# EAGLE board Bottom PCB Board Design (EAGLE 9.7.0), part 1 of 2
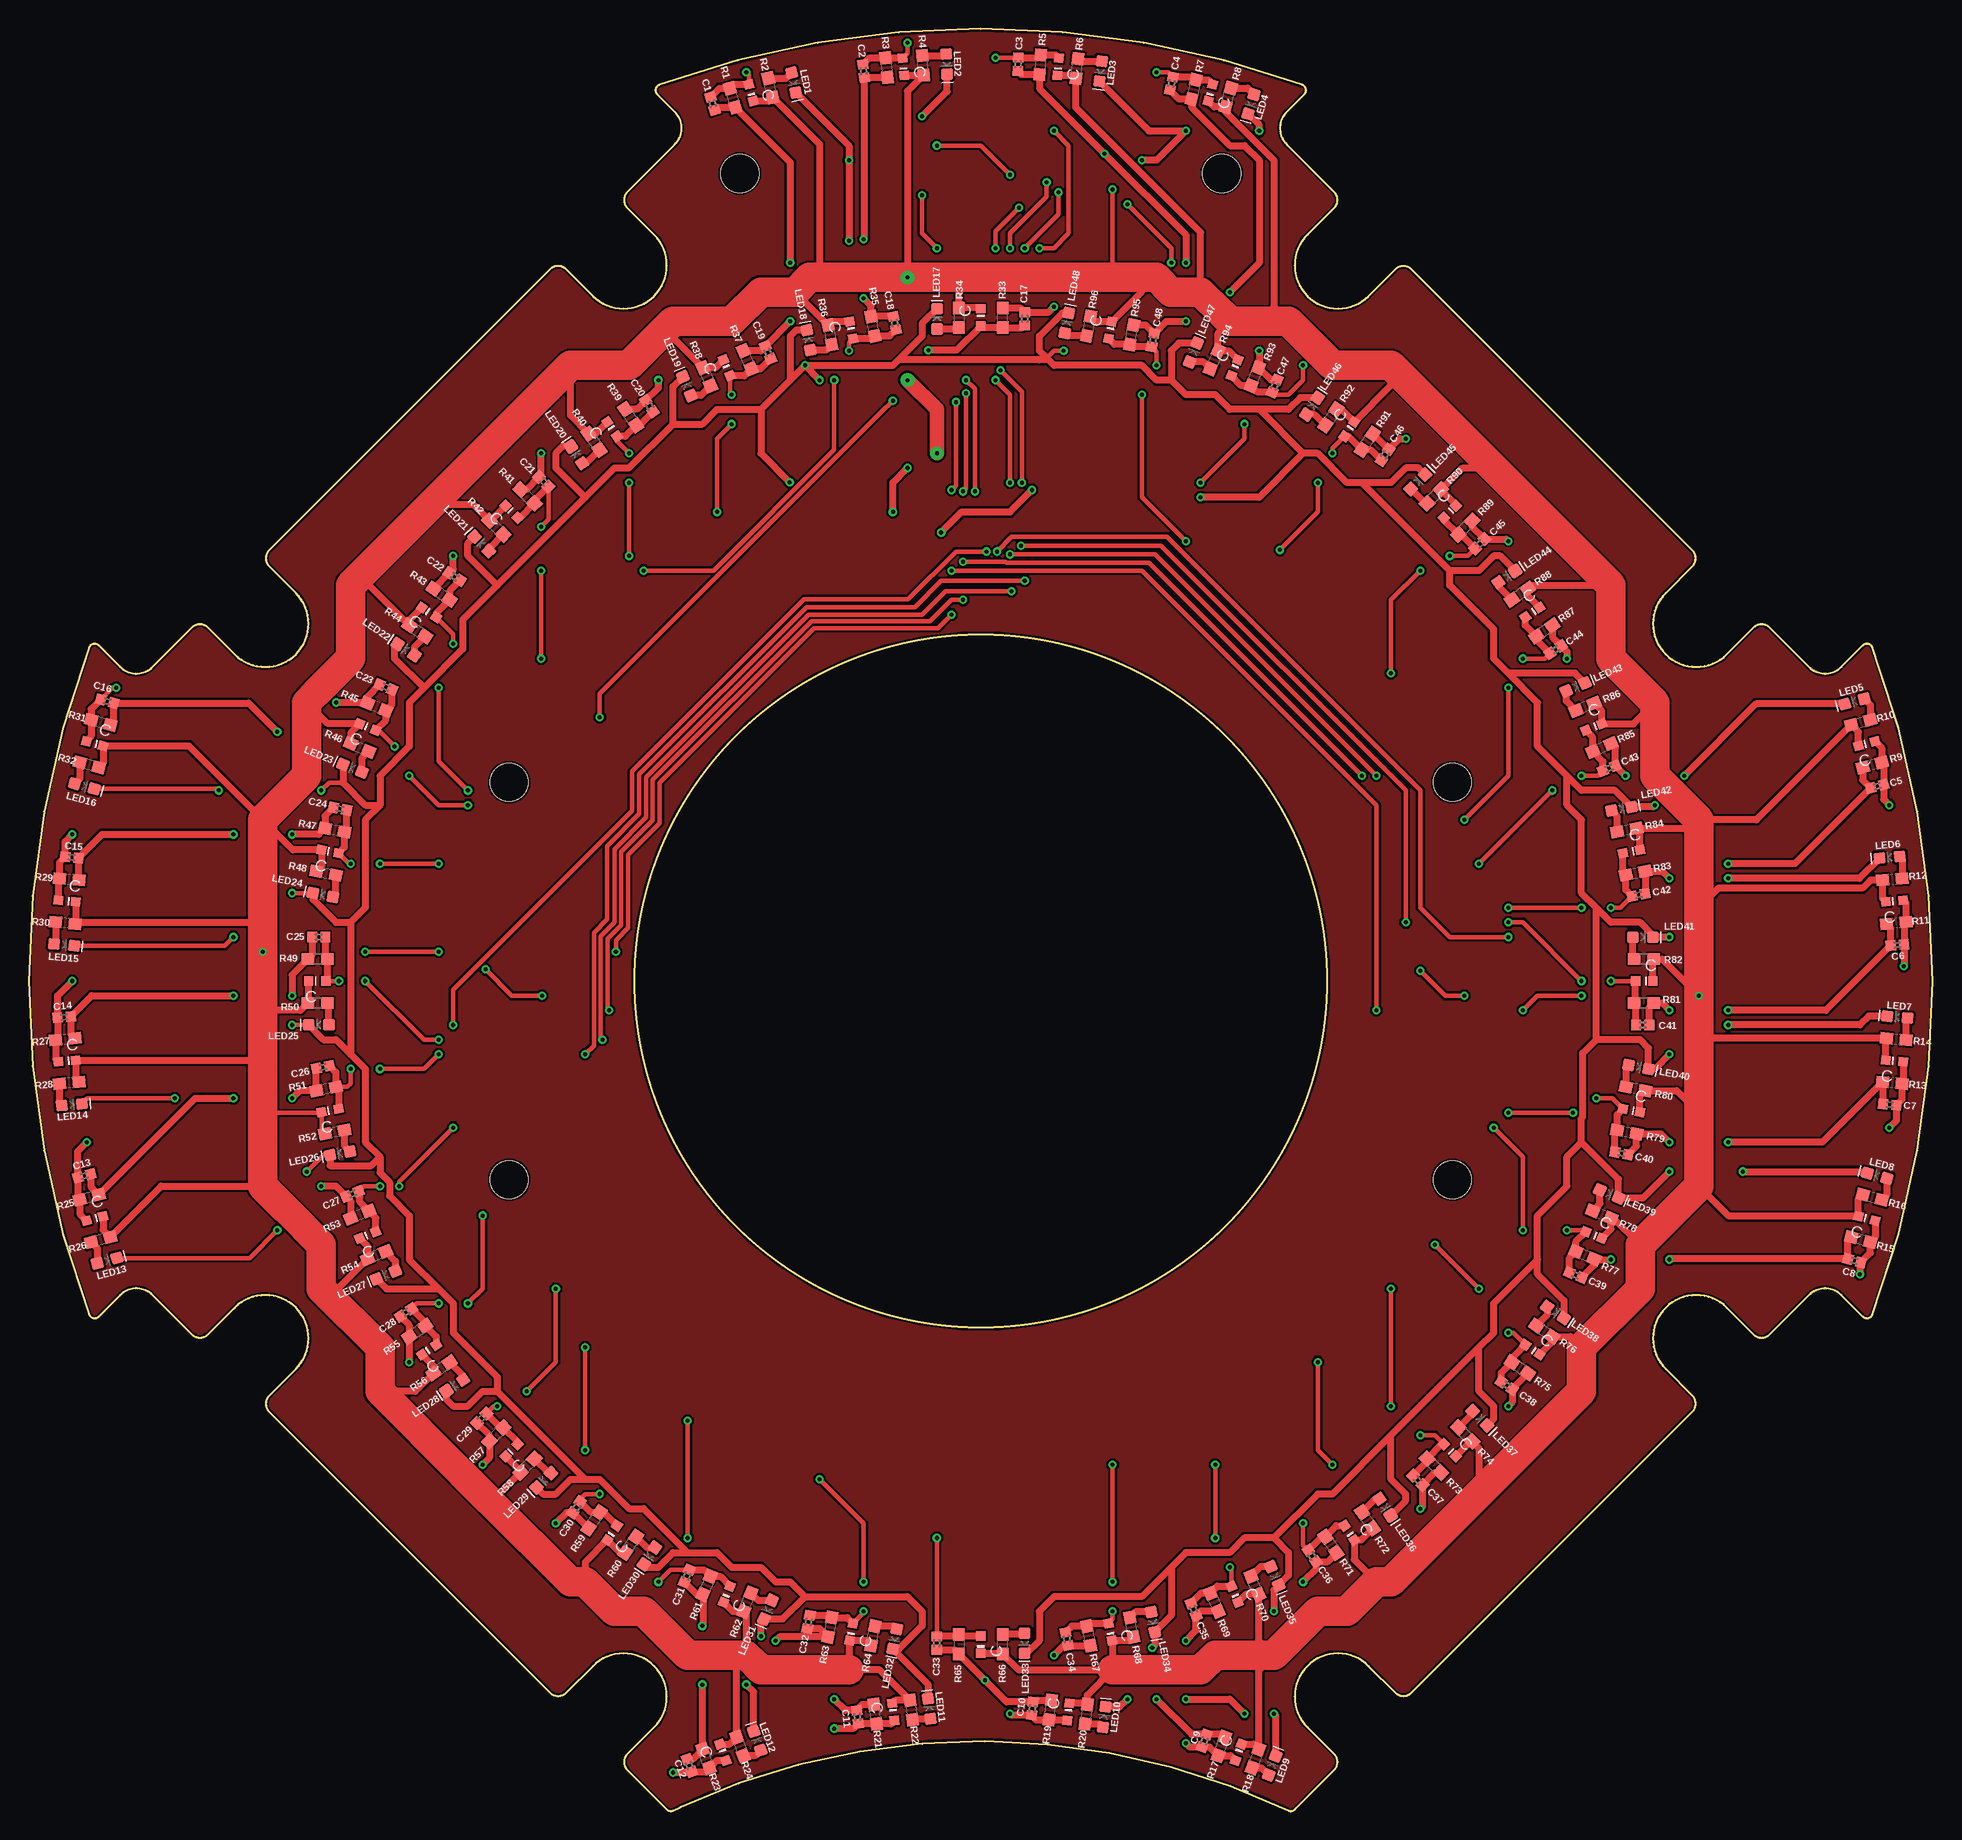
[diagram p0: board, top side]
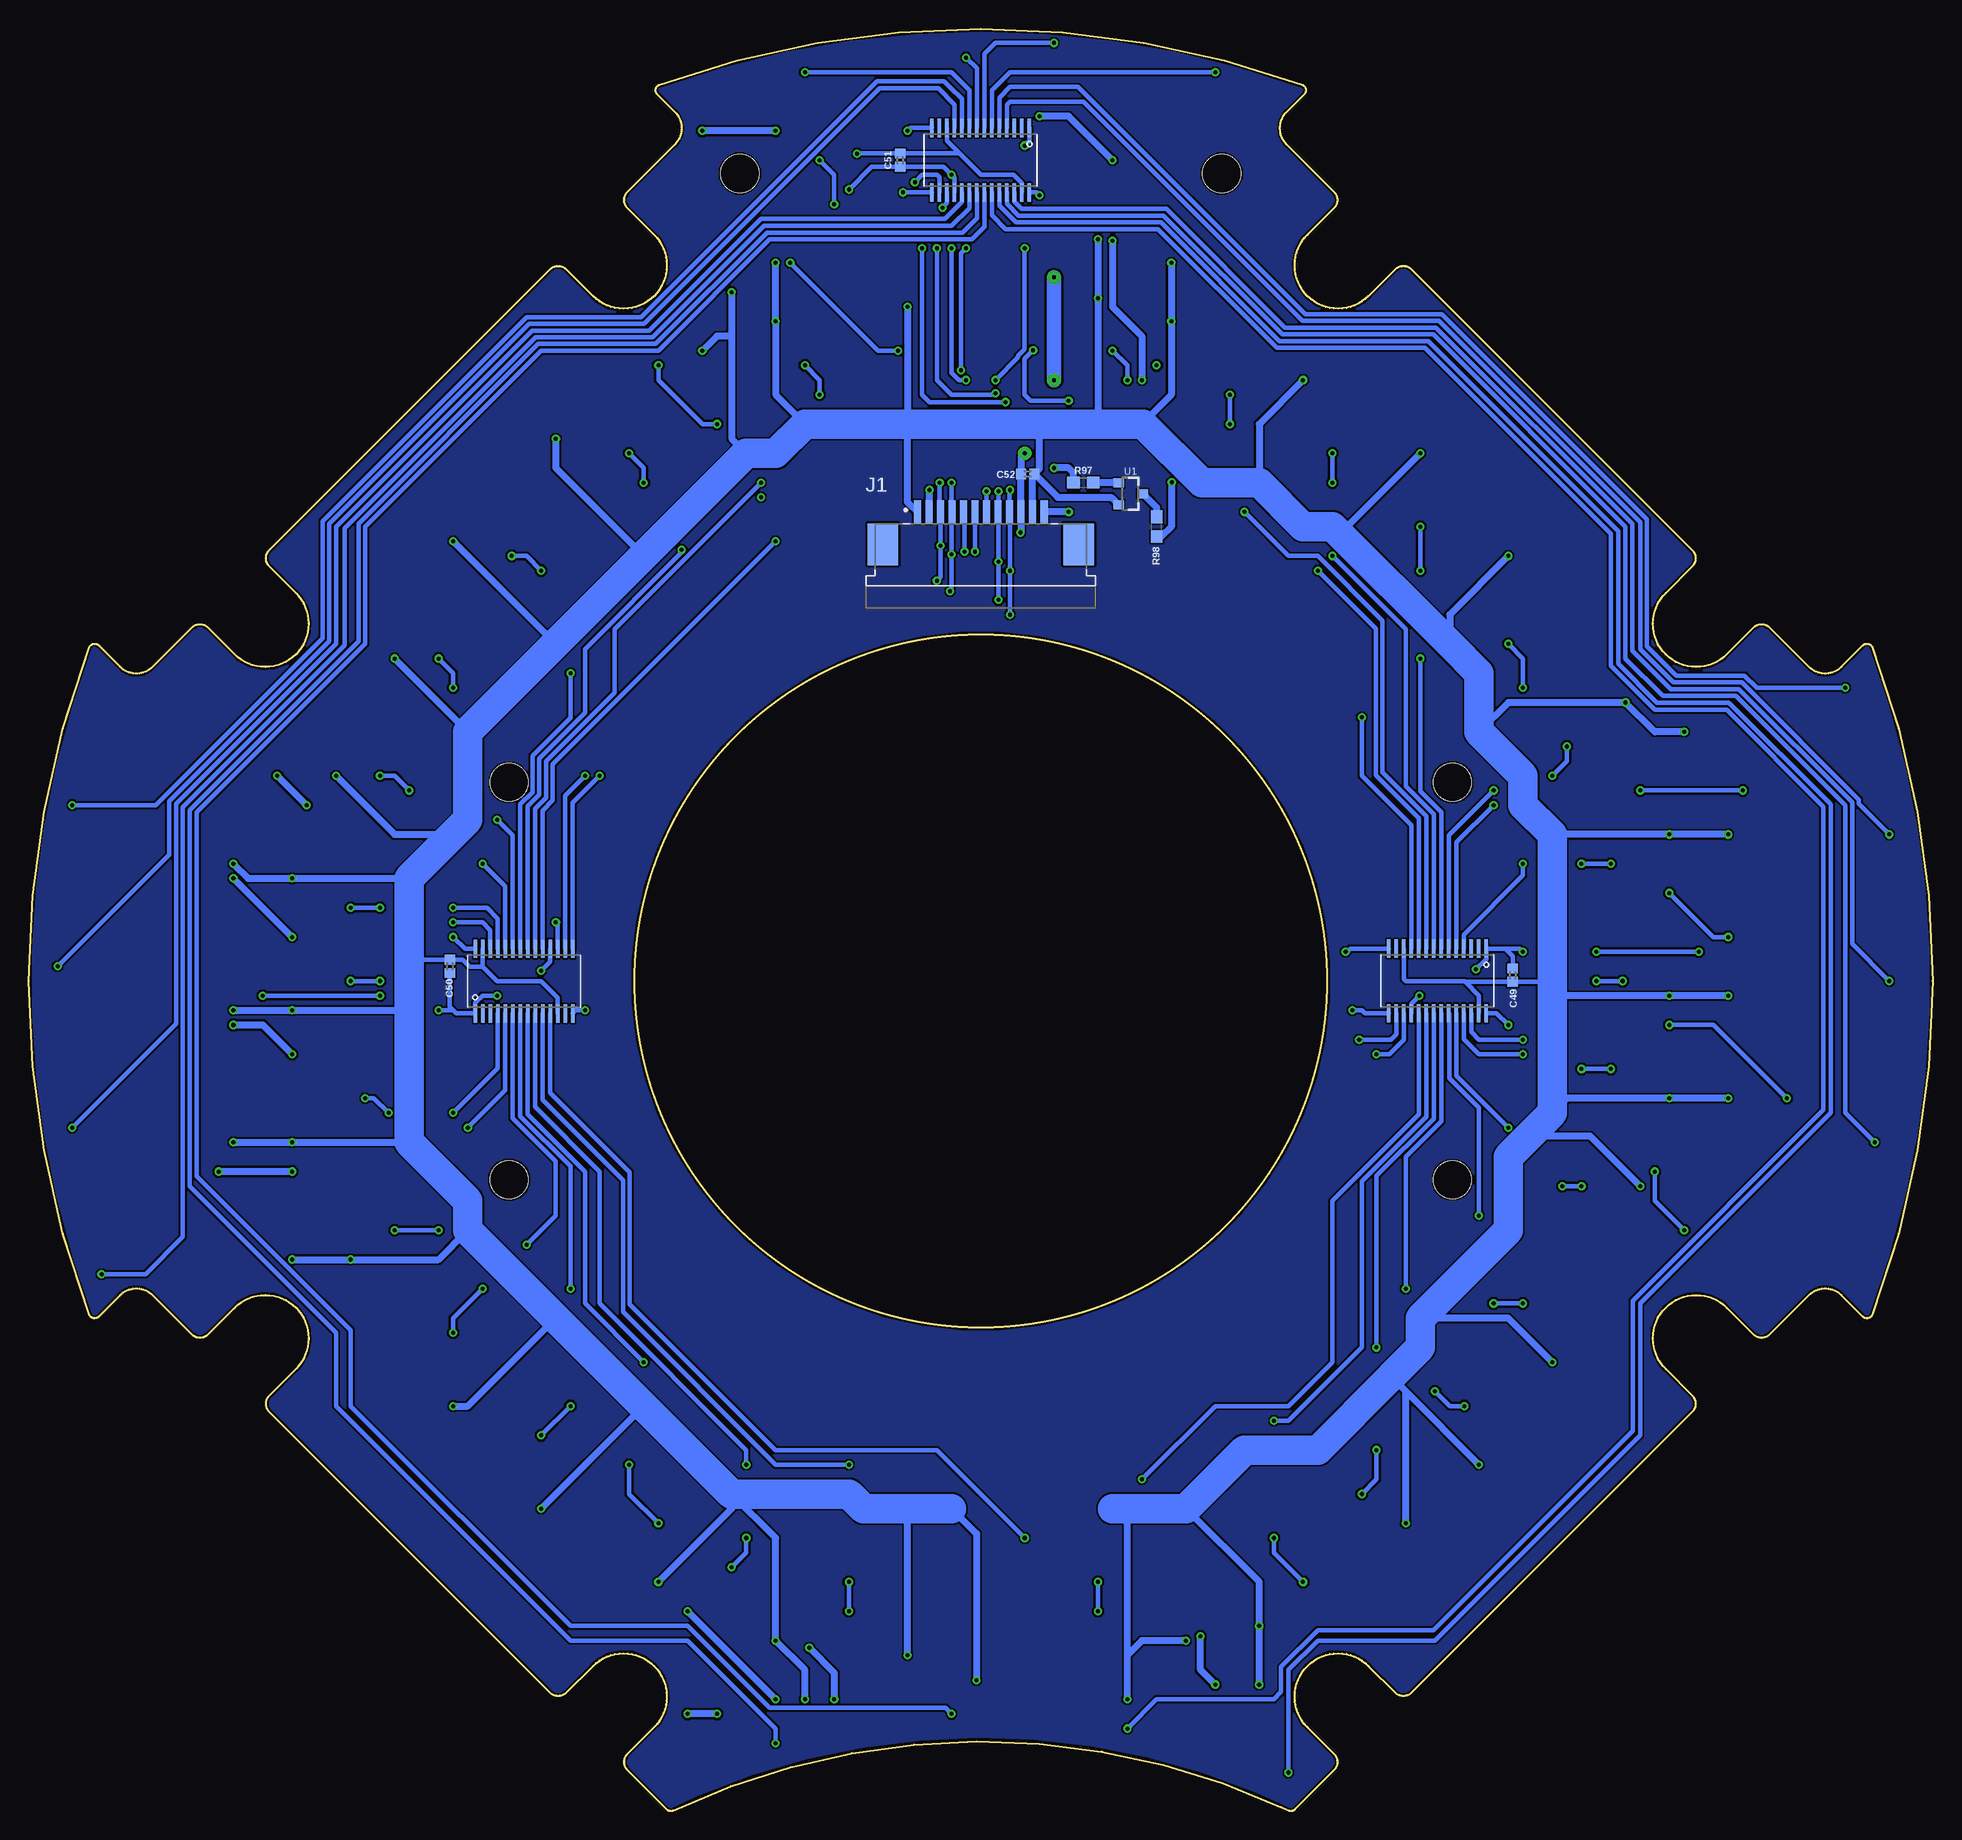
[diagram p1: board, bottom side, seen from below]

Size 165 x 154.42 mm. Coordinates in mm from the lower left corner, seen from the top.
Outline: 23.15,38.31 20.84,36 arc90 20.84,34.59 45.16,10.26 arc90 46.58,10.26 48.89,12.57 arc-180 54.19,7.27 51.88,4.96 arc90 51.88,3.54 55.28,0.15 arc70 55.85,0.05 56.48,0.34 arc-50 109.16,0.05 109.2,0.03 arc65 109.72,0.15 113.12,3.54 arc90 113.12,4.96 110.81,7.27 arc-180 116.11,12.57 118.42,10.26 arc90 119.84,10.26 144.16,34.59 arc90 144.16,36 141.85,38.31 arc-180 147.16,43.61 149.46,41.3 arc90 150.88,41.3 154.27,44.7 arc-90 157.1,44.7 158.95,42.85 arc114 159.77,43.03 arc41 159.77,100.82 159.76,100.86 arc110 158.95,101 157.1,99.15 arc-90 154.27,99.15 150.88,102.54 arc90 149.46,102.54 147.16,100.23 arc-180 141.85,105.54 144.16,107.84 arc90 144.16,109.26 119.84,133.58 arc90 118.42,133.58 116.11,131.28 arc-180 110.81,136.58 113.12,138.89 arc90 113.12,140.3 109.02,144.4 arc-90 109.02,147.23 110.54,148.75 arc115 110.36,149.58 arc39 54.64,149.58 54.6,149.56 arc110 54.46,148.75 55.98,147.23 arc-90 55.98,144.4 51.88,140.3 arc90 51.88,138.89 54.19,136.58 arc-180 48.89,131.28 46.58,133.58 arc90 45.16,133.58 20.84,109.26 arc90 20.84,107.84 23.15,105.54 arc-180 17.84,100.23 15.54,102.54 arc90 14.12,102.54 10.73,99.15 arc-90 7.9,99.15 6.05,101 arc114 5.23,100.82 arc41 5.23,43.03 5.24,42.99 arc110 6.05,42.85 7.9,44.7 arc-90 10.73,44.7 14.12,41.3 arc90 15.54,41.3 17.84,43.61 arc-180 23.15,38.31
Outline: circle at 82.5,71.92 radius 30
Copper layers (1*16): Top / Bottom
Stack-up Default Layer Stack: Top User Defined 0.035mm / Dielectric-1 User Defined 1.5mm / Bottom User Defined 0.035mm
Design rules: minimum copper width 7mil, minimum drill size 0.3mm, copper clearance wire_polygon to wire_polygon 7mil, copper clearance wire_polygon to pad_smd 7mil, copper clearance wire_polygon to via 7mil, copper clearance pad_smd to pad_smd 7mil, copper clearance pad_smd to via 7mil, copper clearance via to via 7mil, copper clearance smd to pad (same net) 7mil, copper clearance smd to via (same net) 7mil, copper clearance smd to smd (same net) 7mil, dimension clearance 7mil, via restrict clearance 0mil, restrict clearance 0mil, drill distance 7mil, keepout clearance 0mil
Holes 3.3 mm at 123.38,89.13 61.62,141.89 41.63,54.71 41.63,89.13 103.39,141.89 123.38,54.71

## Footprints (pad centres in the part's own frame; a part is rotated, then mirrored left to right if it is on the bottom)
0402 = smd 0.85 x 0.9: 1 -0.58,0; 2 0.58,0
TE_1-84953-2 = smd 0.61 x 2: 1 -5.5,0; 2 -4.5,0; 3 -3.5,0; 4 -2.5,0; 5 -1.5,0; 6 -0.5,0; 7 0.5,0; 8 1.5,0; 9 2.5,0; 10 3.5,0; 11 4.5,0; 12 5.5,0 | smd 2.68 x 3.6: S1 -8.49,-2.8; S2 8.49,-2.8
LED-0603 = smd 1 x 1: A -0.877,0; C 0.877,0
28-TSSOP = smd 0.3 x 1.6: 1 0,-5.6; 2 0.65,-5.6; 3 1.3,-5.6; 4 1.95,-5.6; 5 2.6,-5.6; 6 3.25,-5.6; 7 3.9,-5.6; 8 4.55,-5.6; 9 5.2,-5.6; 10 5.85,-5.6; 11 6.5,-5.6; 12 7.15,-5.6; 13 7.8,-5.6; 14 8.45,-5.6; 15 8.45,0; 16 7.8,0; 17 7.15,0; 18 6.5,0; 19 5.85,0; 20 5.2,0; 21 4.55,0; 22 3.9,0; 23 3.25,0; 24 2.6,0; 25 1.95,0; 26 1.3,0; 27 0.65,0; 28 0,0
SMD = smd 0.8 x 0.8: C -0.75,0; E 0.75,0
0603 = smd 1.1 x 1: 1 -0.85,0; 2 0.85,0
SOT23-3 = smd 0.8 x 0.9: 1 -0.95,-1; 2 0.95,-1; 3 0,1.1

## Placement (x,y rotation side)
C1  0.1uF  [0402]  59.26,147.95 107 top
C2  0.1uF  [0402]  72.35,150.77 97 top
C3  0.1uF  [0402]  85.74,151.36 88 top
C4  0.1uF  [0402]  99.03,149.69 78 top
C5  0.1uF  [0402]  160.19,88.8 15 top
C6  0.1uF  [0402]  161.94,75.05 5 top
C7  0.1uF  [0402]  161.27,61.21 355 top
C8  0.1uF  [0402]  158.22,47.69 345 top
C9  0.1uF  [0402]  101.88,6.09 250 top
C10  0.1uF  [0402]  86.97,8.88 263 top
C11  0.1uF  [0402]  71.82,8.15 277 top
C12  0.1uF  [0402]  57.24,3.95 290 top
C13  0.1uF  [0402]  4.81,55.05 195 top
C14  0.1uF  [0402]  3.06,68.79 185 top
C15  0.1uF  [0402]  3.73,82.64 175 top
C16  0.1uF  [0402]  6.78,96.15 165 top
C17  0.1uF  [0402]  86.31,129.3 270 top
C18  0.1uF  [0402]  75.04,128.94 281 top
C19  0.1uF  [0402]  64.06,126.39 293 top
C20  0.1uF  [0402]  53.79,121.74 304 top
C21  0.1uF  [0402]  44.62,115.18 315 top
C22  0.1uF  [0402]  36.91,106.96 326 top
C23  0.1uF  [0402]  30.95,97.39 337 top
C24  0.1uF  [0402]  26.97,86.85 349 top
C25  0.1uF  [0402]  25.13,75.73 0 top
C26  0.1uF  [0402]  25.49,64.46 11 top
C27  0.1uF  [0402]  28.04,53.48 23 top
C28  0.1uF  [0402]  32.68,43.21 34 top
C29  0.1uF  [0402]  39.24,34.04 45 top
C30  0.1uF  [0402]  47.46,26.33 56 top
C31  0.1uF  [0402]  57.03,20.37 68 top
C32  0.1uF  [0402]  67.57,16.39 79 top
C33  0.1uF  [0402]  78.69,14.55 90 top
C34  0.1uF  [0402]  89.96,14.91 101 top
C35  0.1uF  [0402]  100.94,17.46 113 top
C36  0.1uF  [0402]  111.21,22.1 124 top
C37  0.1uF  [0402]  120.38,28.66 135 top
C38  0.1uF  [0402]  128.09,36.88 146 top
C39  0.1uF  [0402]  134.05,46.45 158 top
C40  0.1uF  [0402]  138.03,57 169 top
C41  0.1uF  [0402]  139.87,68.12 180 top
C42  0.1uF  [0402]  139.51,79.38 191 top
C43  0.1uF  [0402]  136.96,90.36 202 top
C44  0.1uF  [0402]  132.32,100.63 214 top
C45  0.1uF  [0402]  125.76,109.8 225 top
C46  0.1uF  [0402]  117.54,117.51 236 top
C47  0.1uF  [0402]  107.97,123.47 247 top
C48  0.1uF  [0402]  97.43,127.45 259 top
C49  0.1uF  [0402]  36.4,72.43 270 bottom
C50  0.1uF  [0402]  128.52,73.19 90 bottom
C51  0.1uF  [0402]  89.49,143.04 90 bottom
C52  0.1uF  [0402]  78.44,115.86 180 bottom
J1  1-84953-2  [TE_1-84953-2]  82.5,112.56 0 bottom
LED1  WHITE  [LED-0603]  66.29,149.76 282 top
LED2  WHITE  [LED-0603]  79.55,151.37 272 top
LED3  WHITE  [LED-0603]  92.88,150.75 263 top
LED4  WHITE  [LED-0603]  105.93,147.9 253 top
LED5  WHITE  [LED-0603]  158.22,96.15 195 top
LED6  WHITE  [LED-0603]  161.27,82.64 185 top
LED7  WHITE  [LED-0603]  161.94,68.79 175 top
LED8  WHITE  [LED-0603]  160.19,55.05 165 top
LED9  WHITE  [LED-0603]  107.76,3.95 70 top
LED10  WHITE  [LED-0603]  93.18,8.15 83 top
LED11  WHITE  [LED-0603]  78.03,8.88 97 top
LED12  WHITE  [LED-0603]  63.12,6.09 110 top
LED13  WHITE  [LED-0603]  6.78,47.69 15 top
LED14  WHITE  [LED-0603]  3.73,61.21 5 top
LED15  WHITE  [LED-0603]  3.06,75.05 355 top
LED16  WHITE  [LED-0603]  4.81,88.8 345 top
LED17  WHITE  [LED-0603]  78.69,129.3 90 top
LED18  WHITE  [LED-0603]  67.57,127.45 101 top
LED19  WHITE  [LED-0603]  57.03,123.47 113 top
LED20  WHITE  [LED-0603]  47.46,117.51 124 top
LED21  WHITE  [LED-0603]  39.24,109.8 135 top
LED22  WHITE  [LED-0603]  32.68,100.63 146 top
LED23  WHITE  [LED-0603]  28.04,90.36 158 top
LED24  WHITE  [LED-0603]  25.49,79.38 169 top
LED25  WHITE  [LED-0603]  25.13,68.12 180 top
LED26  WHITE  [LED-0603]  26.97,57 191 top
LED27  WHITE  [LED-0603]  30.95,46.45 202 top
LED28  WHITE  [LED-0603]  36.91,36.88 214 top
LED29  WHITE  [LED-0603]  44.62,28.66 225 top
LED30  WHITE  [LED-0603]  53.79,22.1 236 top
LED31  WHITE  [LED-0603]  64.06,17.46 247 top
LED32  WHITE  [LED-0603]  75.04,14.91 259 top
LED33  WHITE  [LED-0603]  86.31,14.55 270 top
LED34  WHITE  [LED-0603]  97.43,16.39 281 top
LED35  WHITE  [LED-0603]  107.97,20.37 293 top
LED36  WHITE  [LED-0603]  117.54,26.33 304 top
LED37  WHITE  [LED-0603]  125.76,34.04 315 top
LED38  WHITE  [LED-0603]  132.32,43.21 326 top
LED39  WHITE  [LED-0603]  136.96,53.48 337 top
LED40  WHITE  [LED-0603]  139.51,64.46 349 top
LED41  WHITE  [LED-0603]  139.87,75.73 0 top
LED42  WHITE  [LED-0603]  138.03,86.85 11 top
LED43  WHITE  [LED-0603]  134.05,97.39 23 top
LED44  WHITE  [LED-0603]  128.09,106.96 34 top
LED45  WHITE  [LED-0603]  120.38,115.18 45 top
LED46  WHITE  [LED-0603]  111.21,121.74 56 top
LED47  WHITE  [LED-0603]  100.94,126.39 68 top
LED48  WHITE  [LED-0603]  89.96,128.94 79 top
MUX1  MUX506  [28-TSSOP]  38.69,69.13 180 bottom
MUX2  MUX506  [28-TSSOP]  126.32,74.72 0 bottom
MUX3  MUX506  [28-TSSOP]  78.28,140.25 180 bottom
Q1  ALS  [SMD]  62.59,148.89 105 top
Q2  ALS  [SMD]  75.8,151.14 95 top
Q3  ALS  [SMD]  89.2,151.14 85 top
Q4  ALS  [SMD]  102.41,148.89 75 top
Q5  ALS  [SMD]  159.29,92.5 15 top
Q6  ALS  [SMD]  161.7,78.85 5 top
Q7  ALS  [SMD]  161.7,64.99 355 top
Q8  ALS  [SMD]  159.29,51.35 345 top
Q9  ALS  [SMD]  104.84,5.09 250 top
Q10  ALS  [SMD]  90.08,8.59 263 top
Q11  ALS  [SMD]  74.92,8.59 277 top
Q12  ALS  [SMD]  60.16,5.09 290 top
Q13  ALS  [SMD]  5.71,51.35 195 top
Q14  ALS  [SMD]  3.3,64.99 185 top
Q15  ALS  [SMD]  3.3,78.85 175 top
Q16  ALS  [SMD]  5.71,92.5 165 top
Q17  ALS  [SMD]  82.5,129.42 270 top
Q18  ALS  [SMD]  71.28,128.32 281 top
Q19  ALS  [SMD]  60.5,125.05 293 top
Q20  ALS  [SMD]  50.55,119.73 304 top
Q21  ALS  [SMD]  41.84,112.58 315 top
Q22  ALS  [SMD]  34.69,103.87 326 top
Q23  ALS  [SMD]  29.38,93.93 337 top
Q24  ALS  [SMD]  26.1,83.14 349 top
Q25  ALS  [SMD]  25,71.92 0 top
Q26  ALS  [SMD]  26.1,60.7 11 top
Q27  ALS  [SMD]  29.38,49.92 23 top
Q28  ALS  [SMD]  34.69,39.98 34 top
Q29  ALS  [SMD]  41.84,31.26 45 top
Q30  ALS  [SMD]  50.55,24.11 56 top
Q31  ALS  [SMD]  60.5,18.8 68 top
Q32  ALS  [SMD]  71.28,15.53 79 top
Q33  ALS  [SMD]  82.5,14.42 90 top
Q34  ALS  [SMD]  93.72,15.53 101 top
Q35  ALS  [SMD]  104.5,18.8 113 top
Q36  ALS  [SMD]  114.45,24.11 124 top
Q37  ALS  [SMD]  123.16,31.26 135 top
Q38  ALS  [SMD]  130.31,39.98 146 top
Q39  ALS  [SMD]  135.62,49.92 158 top
Q40  ALS  [SMD]  138.9,60.7 169 top
Q41  ALS  [SMD]  140,71.92 180 top
Q42  ALS  [SMD]  138.9,83.14 191 top
Q43  ALS  [SMD]  135.62,93.93 202 top
Q44  ALS  [SMD]  130.31,103.87 214 top
Q45  ALS  [SMD]  123.16,112.58 225 top
Q46  ALS  [SMD]  114.45,119.73 236 top
Q47  ALS  [SMD]  104.5,125.05 247 top
Q48  ALS  [SMD]  93.72,128.32 259 top
R1  33k  [0603]  60.99,148.44 286 top
R2  100  [0603]  64.28,149.31 103 top
R3  33k  [0603]  74.33,151.07 276 top
R4  100  [0603]  77.49,151.26 94 top
R5  33k  [0603]  87.65,151.31 266 top
R6  100  [0603]  90.83,150.98 84 top
R7  33k  [0603]  100.95,149.17 257 top
R8  100  [0603]  103.95,148.48 74 top
R9  33k  [0603]  159.76,90.65 195 top
R10  100  [0603]  158.78,94.33 15 top
R11  33k  [0603]  161.84,76.95 185 top
R12  100  [0603]  161.51,80.75 5 top
R13  33k  [0603]  161.51,63.1 175 top
R14  100  [0603]  161.84,66.89 355 top
R15  33k  [0603]  158.78,49.51 165 top
R16  100  [0603]  159.76,53.19 345 top
R17  33k  [0603]  103.37,5.61 70 top
R18  100  [0603]  106.31,4.54 250 top
R19  33k  [0603]  88.53,8.76 83 top
R20  100  [0603]  91.64,8.39 263 top
R21  33k  [0603]  73.36,8.39 97 top
R22  100  [0603]  76.47,8.76 277 top
R23  33k  [0603]  58.69,4.54 110 top
R24  100  [0603]  61.63,5.61 290 top
R25  33k  [0603]  5.24,53.19 15 top
R26  100  [0603]  6.22,49.51 195 top
R27  33k  [0603]  3.16,66.89 5 top
R28  100  [0603]  3.49,63.1 185 top
R29  33k  [0603]  3.49,80.75 355 top
R30  100  [0603]  3.16,76.95 175 top
R31  33k  [0603]  6.22,94.33 345 top
R32  100  [0603]  5.24,90.65 165 top
R33  33k  [0603]  84.4,129.39 90 top
R34  100  [0603]  80.6,129.39 270 top
R35  33k  [0603]  73.16,128.66 101 top
R36  100  [0603]  69.42,127.92 281 top
R37  33k  [0603]  62.27,125.75 113 top
R38  100  [0603]  58.75,124.29 293 top
R39  33k  [0603]  52.16,120.76 124 top
R40  100  [0603]  48.99,118.65 304 top
R41  33k  [0603]  43.21,113.91 135 top
R42  100  [0603]  40.52,111.21 315 top
R43  33k  [0603]  35.77,105.43 146 top
R44  100  [0603]  33.66,102.27 326 top
R45  33k  [0603]  30.13,95.67 158 top
R46  100  [0603]  28.68,92.16 337 top
R47  33k  [0603]  26.51,85 169 top
R48  100  [0603]  25.76,81.27 349 top
R49  33k  [0603]  25.03,73.83 180 top
R50  100  [0603]  25.03,70.02 0 top
R51  33k  [0603]  25.76,62.58 191 top
R52  100  [0603]  26.51,58.84 11 top
R53  33k  [0603]  28.68,51.69 202 top
R54  100  [0603]  30.13,48.17 23 top
R55  33k  [0603]  33.66,41.58 214 top
R56  100  [0603]  35.77,38.41 34 top
R57  33k  [0603]  40.52,32.63 225 top
R58  100  [0603]  43.21,29.94 45 top
R59  33k  [0603]  48.99,25.2 236 top
R60  100  [0603]  52.16,23.08 56 top
R61  33k  [0603]  58.75,19.56 247 top
R62  100  [0603]  62.27,18.1 68 top
R63  33k  [0603]  69.42,15.93 259 top
R64  100  [0603]  73.16,15.19 79 top
R65  33k  [0603]  80.6,14.45 270 top
R66  100  [0603]  84.4,14.45 90 top
R67  33k  [0603]  91.84,15.19 281 top
R68  100  [0603]  95.58,15.93 101 top
R69  33k  [0603]  102.73,18.1 293 top
R70  100  [0603]  106.25,19.56 113 top
R71  33k  [0603]  112.84,23.08 304 top
R72  100  [0603]  116.01,25.2 124 top
R73  33k  [0603]  121.79,29.94 315 top
R74  100  [0603]  124.48,32.63 135 top
R75  33k  [0603]  129.23,38.41 326 top
R76  100  [0603]  131.34,41.58 146 top
R77  33k  [0603]  134.87,48.17 337 top
R78  100  [0603]  136.32,51.69 158 top
R79  33k  [0603]  138.49,58.84 349 top
R80  100  [0603]  139.24,62.58 169 top
R81  33k  [0603]  139.97,70.02 0 top
R82  100  [0603]  139.97,73.83 180 top
R83  33k  [0603]  139.24,81.27 11 top
R84  100  [0603]  138.49,85 191 top
R85  33k  [0603]  136.32,92.16 23 top
R86  100  [0603]  134.87,95.67 202 top
R87  33k  [0603]  131.34,102.27 34 top
R88  100  [0603]  129.23,105.43 214 top
R89  33k  [0603]  124.48,111.21 45 top
R90  100  [0603]  121.79,113.91 225 top
R91  33k  [0603]  116.01,118.65 56 top
R92  100  [0603]  112.84,120.76 236 top
R93  33k  [0603]  106.25,124.29 68 top
R94  100  [0603]  102.73,125.75 247 top
R95  33k  [0603]  95.58,127.92 79 top
R96  100  [0603]  91.84,128.66 259 top
R97  100  [0603]  73.61,115.1 0 bottom
R98  100  [0603]  67.26,111.29 90 bottom
U1  AO3404  [SOT23-3]  69.55,114.14 270 bottom

## Library data of the parts
C1-C52 = SparkFun-Capacitors; PROD_ID: CAP-13456
J1 = real 12p ffc connector; MANUFACTURER: TE Connectivity; MAXIMUM_PACKAGE_HEIGHT: 2.74 mm; PARTREV: A4; STANDARD: Manufacturer Recommendations
LED1-LED48 = SparkFun-LED; PROD_ID: DIO-00819
MUX1-MUX3 = MUX
Q1-Q48 = phototransitor-ALS-PT19-315CL177TR8
R1-R98 = SparkFun-Resistors
U1 = AO3404; AVAILABILITY: In Stock; CHECK_PRICES: https://www.snapeda.com/parts/AO3404/Alpha/view-part/?ref=eda; DESCRIPTION: N-Channel 30 V 5.8A (Ta) 1.4W (Ta) Surface Mount SOT-23-3; MF: Alpha & Omega Semiconductor Inc.; MP: AO3404; PACKAGE: None; PRICE: None; SNAPEDA_LINK: https://www.snapeda.com/parts/AO3404/Alpha/view-part/?ref=snap

## Nets
3.3V: C49.1 C50.1 C51.1 C52.2 J1.2 J1.10 MUX1.1 MUX1.18 MUX2.1 MUX2.18 MUX3.1 MUX3.18 Q1.C Q2.C Q3.C Q4.C Q5.C Q6.C Q7.C Q8.C Q9.C Q10.C Q11.C Q12.C Q13.C Q14.C Q15.C Q16.C Q17.C Q18.C Q19.C Q20.C Q21.C Q22.C Q23.C Q24.C Q25.C Q26.C Q27.C Q28.C Q29.C Q30.C Q31.C Q32.C Q33.C Q34.C Q35.C Q36.C Q37.C Q38.C Q39.C Q40.C Q41.C Q42.C Q43.C Q44.C Q45.C Q46.C Q47.C Q48.C R2.1 R4.1 R6.1 R8.1 R10.1 R12.1 R14.1 R16.1 R18.1 R20.1 R22.1 R24.1 R26.1 R28.1 R30.1 R32.1 R34.1 R36.1 R38.1 R40.1 R42.1 R44.1 R46.1 R48.1 R50.1 R52.1 R54.1 R56.1 R58.1 R60.1 R62.1 R64.1 R66.1 R68.1 R70.1 R72.1 R74.1 R76.1 R78.1 R80.1 R82.1 R84.1 R86.1 R88.1 R90.1 R92.1 R94.1 R96.1
DRAIN: LED1.C LED2.C LED3.C LED4.C LED5.C LED6.C LED7.C LED8.C LED9.C LED10.C LED11.C LED12.C LED13.C LED14.C LED15.C LED16.C LED17.C LED18.C LED19.C LED20.C LED21.C LED22.C LED23.C LED24.C LED25.C LED26.C LED27.C LED28.C LED29.C LED30.C LED31.C LED32.C LED33.C LED34.C LED35.C LED36.C LED37.C LED38.C LED39.C LED40.C LED41.C LED42.C LED43.C LED44.C LED45.C LED46.C LED47.C LED48.C R98.1
GND: C1.1 C2.1 C3.1 C4.1 C5.1 C6.1 C7.1 C8.1 C9.1 C10.1 C11.1 C12.1 C13.1 C14.1 C15.1 C16.1 C17.1 C18.1 C19.1 C20.1 C21.1 C22.1 C23.1 C24.1 C25.1 C26.1 C27.1 C28.1 C29.1 C30.1 C31.1 C32.1 C33.1 C34.1 C35.1 C36.1 C37.1 C38.1 C39.1 C40.1 C41.1 C42.1 C43.1 C44.1 C45.1 C46.1 C47.1 C48.1 C49.2 C50.2 C51.2 C52.1 J1.1 J1.11 MUX1.12 MUX1.27 MUX2.12 MUX2.27 MUX3.12 MUX3.27 R1.2 R3.2 R5.2 R7.2 R9.2 R11.2 R13.2 R15.2 R17.2 R19.2 R21.2 R23.2 R25.2 R27.2 R29.2 R31.2 R33.2 R35.2 R37.2 R39.2 R41.2 R43.2 R45.2 R47.2 R49.2 R51.2 R53.2 R55.2 R57.2 R59.2 R61.2 R63.2 R65.2 R67.2 R69.2 R71.2 R73.2 R75.2 R77.2 R79.2 R81.2 R83.2 R85.2 R87.2 R89.2 R91.2 R93.2 R95.2 U1.2
LED_PWM: J1.12 R97.1
LS1: C1.2 MUX3.6 Q1.E R1.1
LS2: C2.2 MUX3.7 Q2.E R3.1
LS3: C3.2 MUX3.8 Q3.E R5.1
LS4: C4.2 MUX3.9 Q4.E R7.1
LS5: C5.2 MUX3.10 Q5.E R9.1
LS6: C6.2 MUX3.11 Q6.E R11.1
LS7: C7.2 MUX3.19 Q7.E R13.1
LS8: C8.2 MUX3.20 Q8.E R15.1
LS9: C9.2 MUX3.21 Q9.E R17.1
LS10: C10.2 MUX3.22 Q10.E R19.1
LS11: C11.2 MUX3.23 Q11.E R21.1
LS12: C12.2 MUX3.24 Q12.E R23.1
LS13: C13.2 MUX3.25 Q13.E R25.1
LS14: C14.2 MUX3.26 Q14.E R27.1
LS15: C15.2 MUX3.4 Q15.E R29.1
LS16: C16.2 MUX3.5 Q16.E R31.1
LS17: C17.2 MUX1.11 Q17.E R33.1
LS18: C18.2 MUX1.10 Q18.E R35.1
LS19: C19.2 MUX1.9 Q19.E R37.1
LS20: C20.2 MUX1.8 Q20.E R39.1
LS21: C21.2 MUX1.7 Q21.E R41.1
LS22: C22.2 MUX1.6 Q22.E R43.1
LS23: C23.2 MUX1.5 Q23.E R45.1
LS24: C24.2 MUX1.4 Q24.E R47.1
LS25: C25.2 MUX1.26 Q25.E R49.1
LS26: C26.2 MUX1.25 Q26.E R51.1
LS27: C27.2 MUX1.24 Q27.E R53.1
LS28: C28.2 MUX1.23 Q28.E R55.1
LS29: C29.2 MUX1.22 Q29.E R57.1
LS30: C30.2 MUX1.21 Q30.E R59.1
LS31: C31.2 MUX1.20 Q31.E R61.1
LS32: C32.2 MUX1.19 Q32.E R63.1
LS33: C33.2 MUX2.11 Q33.E R65.1
LS34: C34.2 MUX2.10 Q34.E R67.1
LS35: C35.2 MUX2.9 Q35.E R69.1
LS36: C36.2 MUX2.8 Q36.E R71.1
LS37: C37.2 MUX2.7 Q37.E R73.1
LS38: C38.2 MUX2.6 Q38.E R75.1
LS39: C39.2 MUX2.5 Q39.E R77.1
LS40: C40.2 MUX2.4 Q40.E R79.1
LS41: C41.2 MUX2.26 Q41.E R81.1
LS42: C42.2 MUX2.25 Q42.E R83.1
LS43: C43.2 MUX2.24 Q43.E R85.1
LS44: C44.2 MUX2.23 Q44.E R87.1
LS45: C45.2 MUX2.22 Q45.E R89.1
LS46: C46.2 MUX2.21 Q46.E R91.1
LS47: C47.2 MUX2.20 Q47.E R93.1
LS48: C48.2 MUX2.19 Q48.E R95.1
MPLS1: J1.3 MUX1.17 MUX2.17 MUX3.17
MPLS2: J1.4 MUX1.16 MUX2.16 MUX3.16
MPLS3: J1.8 MUX1.15 MUX2.15 MUX3.15
MPLS4: J1.9 MUX1.14 MUX2.14 MUX3.14
MPOUT: J1.5 MUX2.28
MPOUT2: J1.6 MUX1.28
MPOUT3: J1.7 MUX3.28
N$1: LED2.A R4.2
N$2: LED3.A R6.2
N$3: LED4.A R8.2
N$4: LED5.A R10.2
N$5: LED6.A R12.2
N$6: LED7.A R14.2
N$7: LED8.A R16.2
N$8: LED9.A R18.2
N$9: LED10.A R20.2
N$10: LED11.A R22.2
N$11: LED12.A R24.2
N$12: LED13.A R26.2
N$13: LED14.A R28.2
N$14: LED15.A R30.2
N$15: LED16.A R32.2
N$16: LED17.A R34.2
N$17: LED18.A R36.2
N$18: LED19.A R38.2
N$19: LED20.A R40.2
N$20: LED21.A R42.2
N$21: LED22.A R44.2
N$22: LED23.A R46.2
N$23: LED24.A R48.2
N$24: LED25.A R50.2
N$25: LED26.A R52.2
N$26: LED27.A R54.2
N$27: LED28.A R56.2
N$28: LED29.A R58.2
N$29: LED30.A R60.2
N$30: LED31.A R62.2
N$31: LED1.A R2.2
N$32: LED32.A R64.2
N$33: LED33.A R66.2
N$34: LED34.A R68.2
N$35: LED35.A R70.2
N$36: LED36.A R72.2
N$37: LED37.A R74.2
N$38: LED38.A R76.2
N$39: LED39.A R78.2
N$40: LED40.A R80.2
N$41: LED41.A R82.2
N$42: LED42.A R84.2
N$43: LED43.A R86.2
N$44: LED44.A R88.2
N$45: LED45.A R90.2
N$46: LED46.A R92.2
N$47: LED47.A R94.2
N$48: LED48.A R96.2
N$53: R97.2 U1.1
N$54: R98.2 U1.3